# Allegro board LAUNCHPAD_checkpoint0.brd
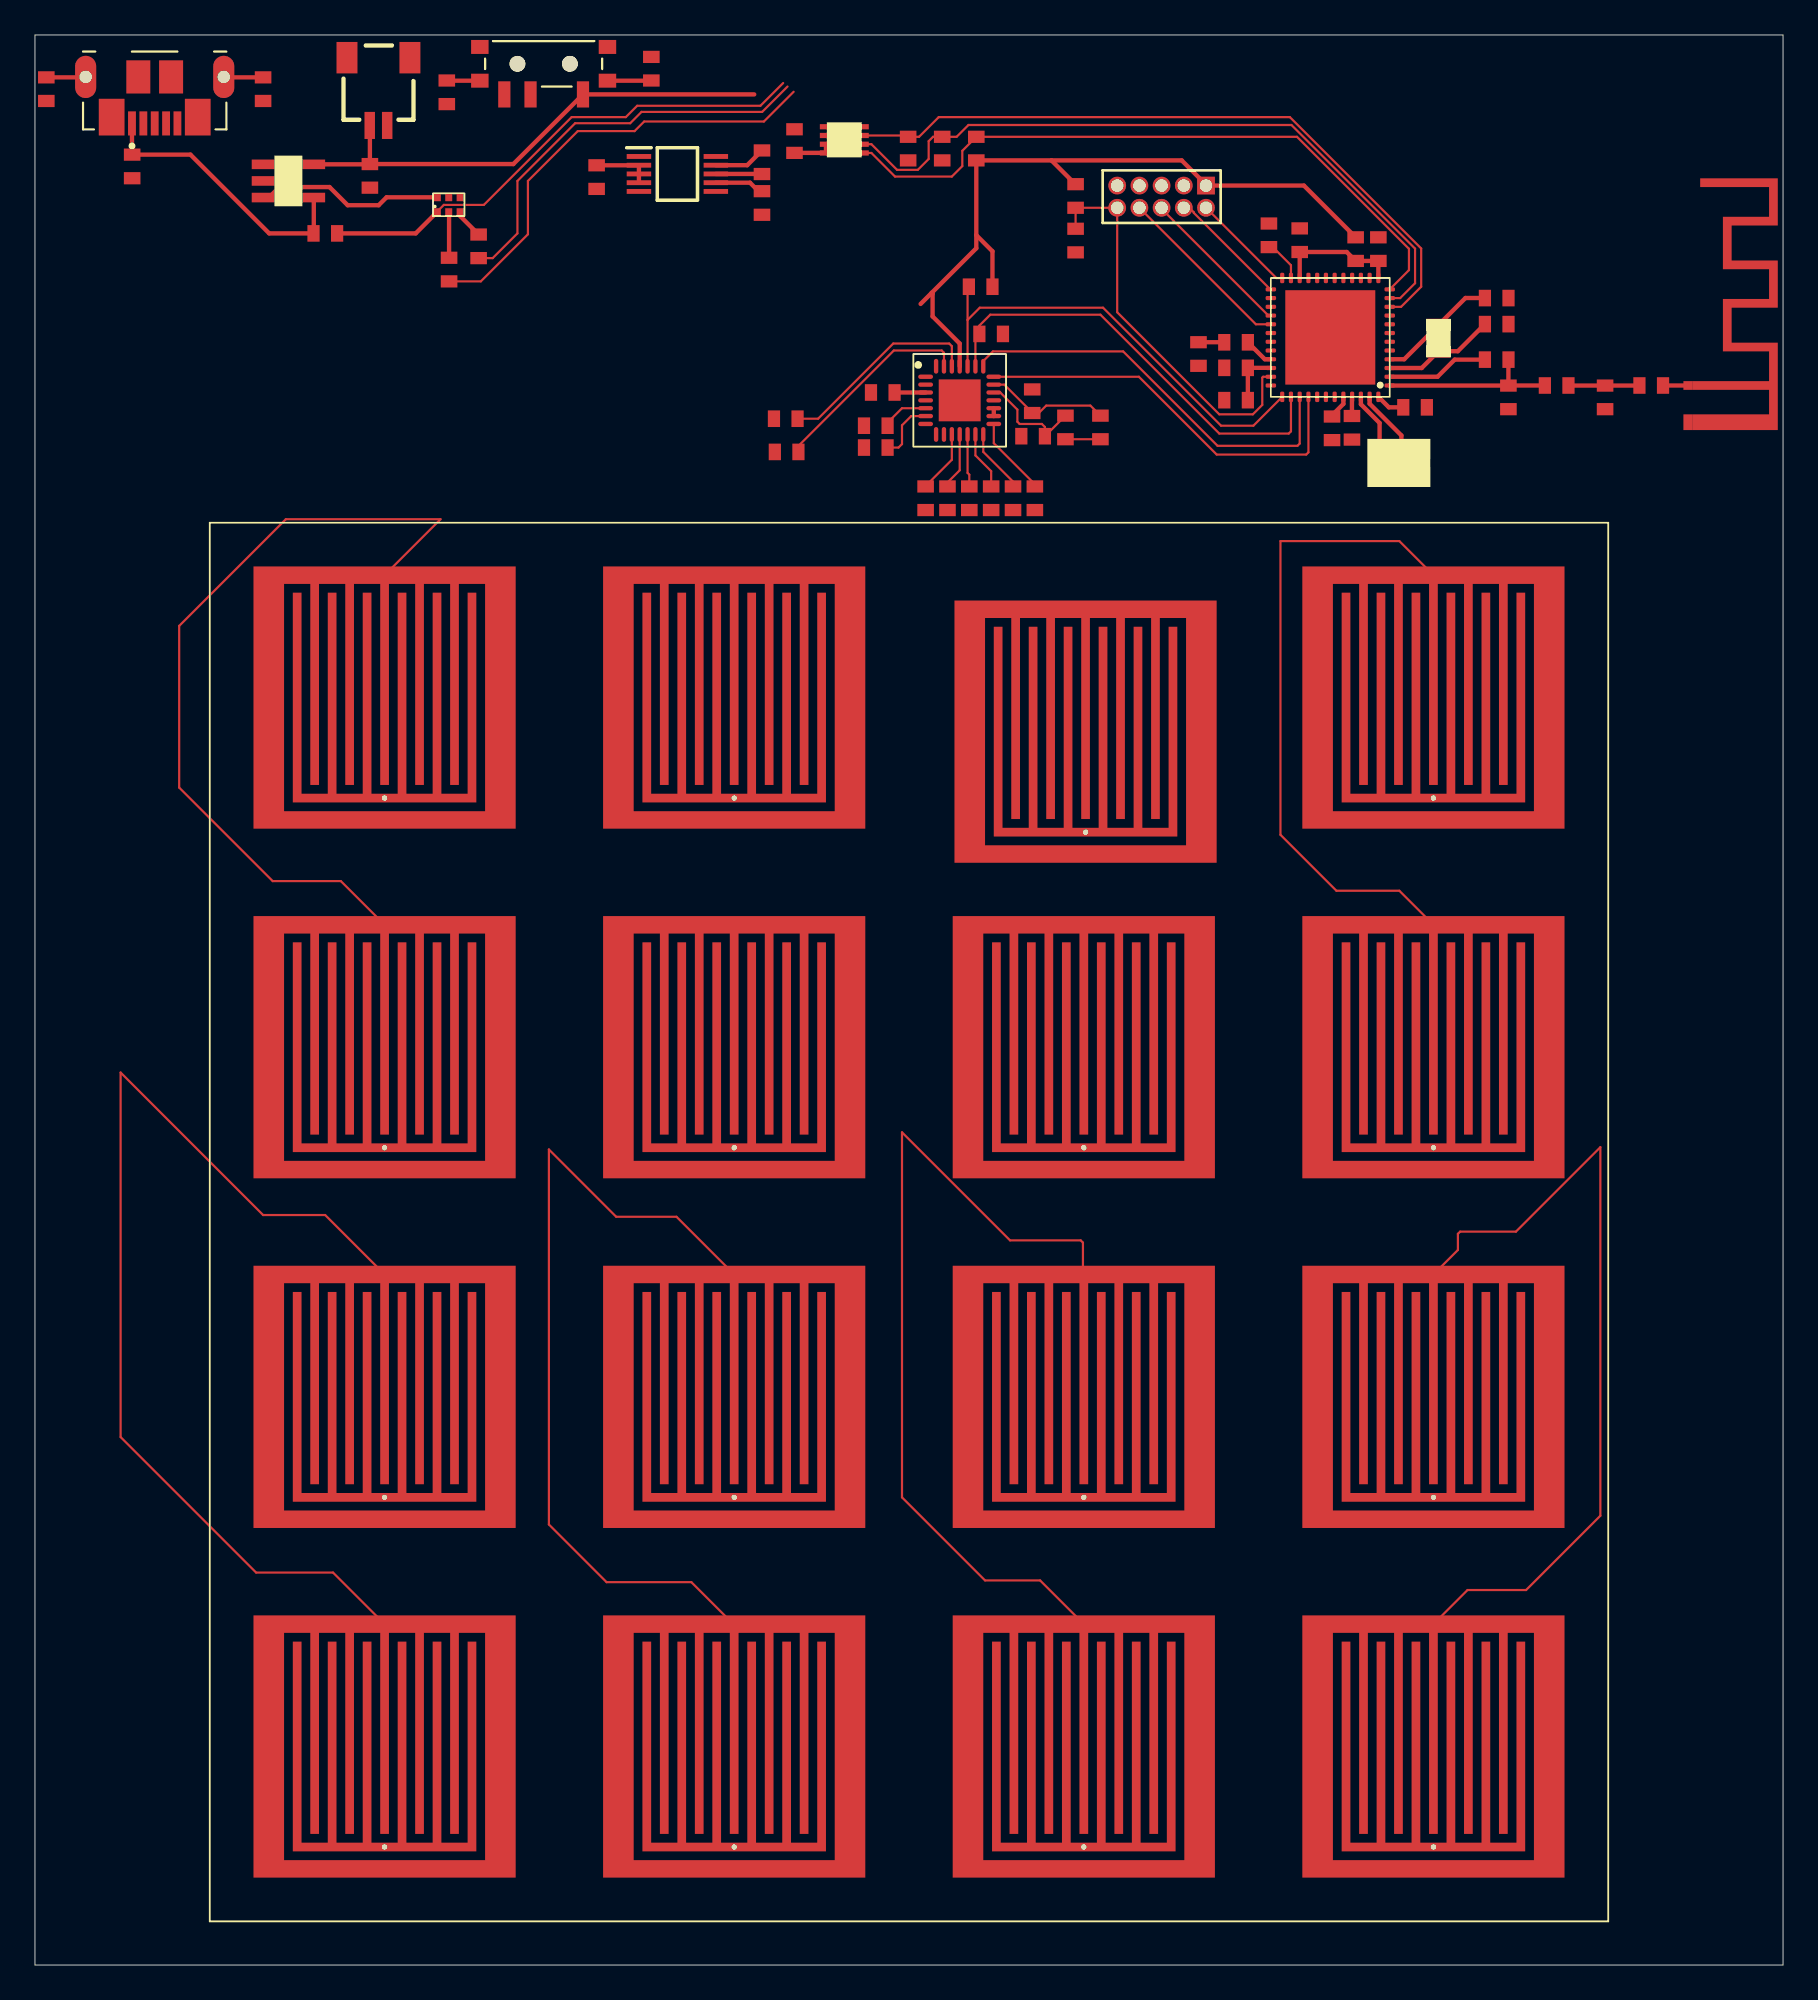
[diagram p0: board, top side]
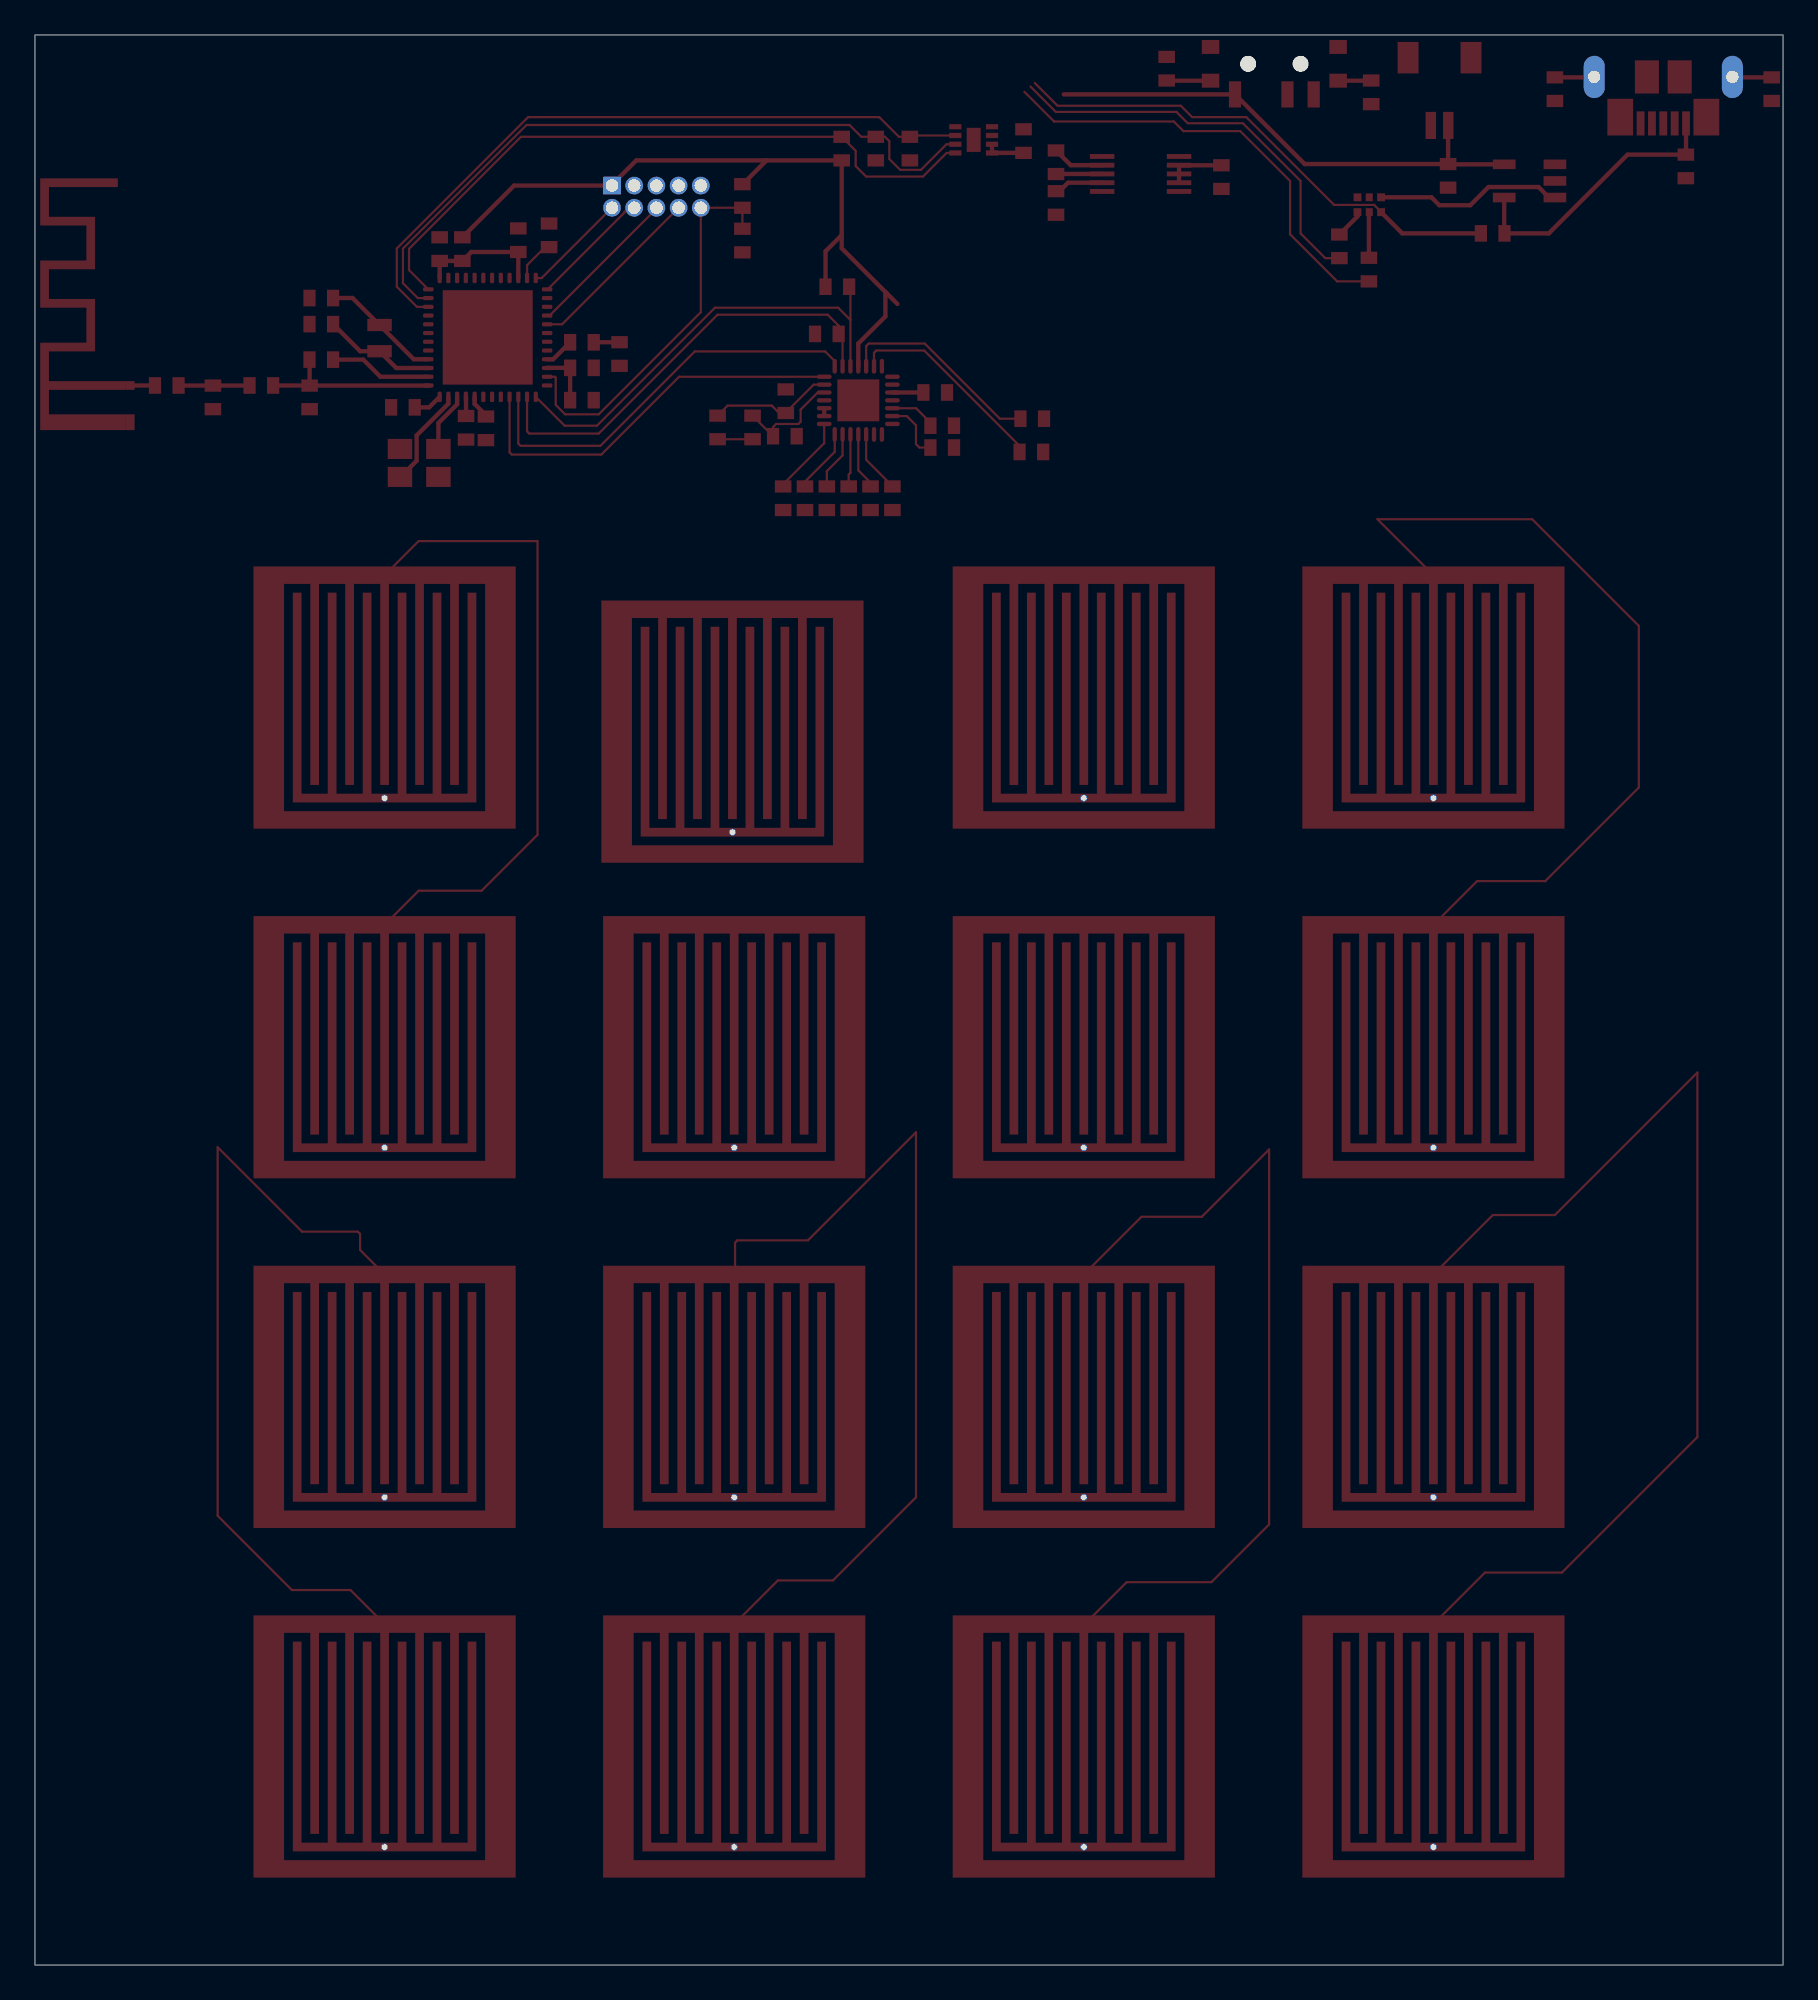
[diagram p1: board, bottom side, seen from below]

Outline 100 x 110.4 mm; copper layers: TOP, BOTTOM. Coordinates in mm from the lower left corner of the outline.
Outline path: 0,110.4 0,0 100,0 100,110.4 0,110.4

## Design rules (mm)
constraint set DEFAULT: min track width 0.127

## Placement (name value [footprint] x y rotation side)
A1  TI AN043  [AN043_PATCH_ANTENNA]  94.8 87.3 270 top
B1  QMatrix_Button  [QMATRIX_BUTTON_TOP]  20 32.5 0 top
B2  QMatrix_Button  [QMATRIX_BUTTON_TOP]  20 72.5 0 top
B3  QMatrix_Button  [QMATRIX_BUTTON_TOP]  40 32.5 0 top
B4  QMatrix_Button  [QMATRIX_BUTTON_TOP]  40 72.5 0 top
B5  QMatrix_Button  [QMATRIX_BUTTON_TOP]  60 32.5 0 top
B6  QMatrix_Button  [QMATRIX_BUTTON_TOP]  60.1 70.55 0 top
B7  QMatrix_Button  [QMATRIX_BUTTON_TOP]  80 72.5 0 top
B8  QMatrix_Button  [QMATRIX_BUTTON_TOP]  80 32.5 0 top
B9  QMatrix_Button  [QMATRIX_BUTTON_TOP]  20 12.5 0 top
B10  QMatrix_Button  [QMATRIX_BUTTON_TOP]  20 52.5 0 top
B11  QMatrix_Button  [QMATRIX_BUTTON_TOP]  40 12.5 0 top
B12  QMatrix_Button  [QMATRIX_BUTTON_TOP]  40 52.5 0 top
B13  QMatrix_Button  [QMATRIX_BUTTON_TOP]  60 12.5 0 top
B14  QMatrix_Button  [QMATRIX_BUTTON_TOP]  60 52.5 0 top
B15  QMatrix_Button  [QMATRIX_BUTTON_TOP]  80 52.5 0 top
B16  QMatrix_Button  [QMATRIX_BUTTON_TOP]  80 12.5 0 top
C1  12pF  [0603_C]  83.62 93.86 180 top
C2  12pF  [0603_C]  83.62 95.35 180 top
C3  1uF  [0603_C]  70.59 98.94 270 top
C4  100nF  [0603_C]  76.85 98.15 270 top
C5  100nF  [0603_C]  74.2 87.9 90 top
C6  10uF  [0603_C]  66.56 92.15 90 top
C7  100nF  [0603_C]  75.34 87.93 90 top
C8  100nF  [0603_C]  78.95 89.1 180 top
C9  100nF  [0603_C]  72.35 98.66 270 top
C10  100nF  [0603_C]  68.71 91.36 0 top
C11  10uF  [0603_C]  68.71 89.51 0 top
C12  12pF  [0603_C]  92.46 90.35 0 top
C13  1.2pF  [0603_C]  84.29 89.67 90 top
C14  1.2pF  [0603_C]  89.82 89.67 90 top
C15  100nF  [0603_C]  59.53 98.64 90 top
C16  330nF  [0603_C]  41.59 103.12 90 top
C17  100nF  [0603_C]  43.45 104.33 270 top
C18  10uF  [0603_C]  32.13 102.27 90 top
C19  10uF  [0603_C]  41.59 100.79 90 top
C20  1u  [0603_C]  19.16 102.34 90 top
C21  1u  [0603_C]  5.56 102.88 90 top
C22  100nF  [0603_C]  48.5 89.95 180 top
C23  4.7 nF  [0603_C]  57.1 87.45 180 top
C24  4.7 nF  [0603_C]  57.05 89.45 90 top
IC1  SC20S-7PF20PPM  [SMD_SC20S-7PF20PPM]  80.29 93.06 90 top
J1  FTSH-105-01-L-D-RA-K  [SAMTEC_FTSH-105-01-L-D-K]  64.45 101.15 180 top
J2  1051640001  [MOLEX_105164-0001]  6.85 109.45 180 top
J3  -  [SM02B-SRSS-TBLFSN]  19.65 107.2 180 top
L1  BLM18EG121SH1D  [0603_L]  75.55 98.15 270 top
L2  10uH  [0603_L]  68.71 92.82 180 top
L3  15nH  [0603_L]  83.62 91.83 0 top
L4  2nH  [0603_L]  87.05 90.35 0 top
LED1  SMLP36  [SMD_SMLP36]  23.67 100.69 0 top
R1  100kOhm  [0603_R]  59.53 101.19 90 top
R2  3.3kOhm  [0603_R]  53.85 103.9 270 top
R3  3.3kOhm  [0603_R]  51.9 103.9 270 top
R4  3.3kOhm  [0603_R]  49.95 103.9 270 top
R5  240 Ohm  [0603_R]  16.61 99.05 180 top
R6  33kOhm  [0603_R]  23.56 107.12 90 top
R7  33kOhm  [0603_R]  35.26 108.47 270 top
R8  33k  [0603_R]  13.05 107.3 270 top
R9  270 Ohm  [0603_R]  23.69 96.98 90 top
R10  82 Ohm  [0603_R]  25.38 98.31 90 top
R11  33k  [0603_R]  0.65 107.3 270 top
R13  3.3kOhm  [0603_R]  54.1 96 0 top
R14  3.3kOhm  [0603_R]  54.7 93.3 0 top
R15  1kOhm  [0603_R]  48.1 86.8 180 top
R16  1kOhm  [0603_R]  48.1 88.05 180 top
R17  1kOhm  [0603_R]  57.2 83.9 270 top
R18  1kOhm  [0603_R]  55.95 83.9 270 top
R19  1kOhm  [0603_R]  54.7 83.9 270 top
R20  1kOhm  [0603_R]  53.45 83.9 270 top
R21  1kOhm  [0603_R]  52.2 83.9 270 top
R22  1kOhm  [0603_R]  50.95 83.9 270 top
R23  1kOhm  [0603_R]  42.95 88.45 180 top
R24  1kOhm  [0603_R]  43 86.55 180 top
R25  1MOhm  [0603_R]  60.95 87.95 90 top
R26  1MOhm  [0603_R]  58.95 87.95 90 top
SW1  PCM12SMTR  [SW_PCM12SMTR]  29.1 108.75 180 top
U1  TI-CC2640  [SMD_CC2640R2F_RGZ_48]  74.1 93.1 180 top
U2  MAX1759  [SMD_MAX1759]  36.75 102.45 0 top
U3  MAX17048  [SMD_MAX17048]  46.3 104.4 270 top
U4  MAXIM MAX1555  [SMD_MAX1555]  14.5 102.05 270 top
U5  AT42QT2160  [QFN45P400X400X90-29N-D]  52.9 89.5 0 top
Y1  TSX-3225240000MF15X-AC3  [SMD_TSX-3225240000MF15X-AC3]  78.02 85.92 0 top

## Library data of the parts
A1 = Antenna
B1-B16 = QMatrix_Button
C1-C24 = C
IC1 = SC20S-7PF20PPM
J1 = FTSH-105-01-L-D-RA-K
J2 = 1051640001
J3 = SM02B-SRSS-TBLFSN
L1 = FerriteBead
L2-L4 = L
LED1 = SMLP36
R1-R11 R13-R26 = R
SW1 = PCM12SMTR
U1 = TI-CC2640
U2 = MAX1759
U3 = MAX17048
U4 = MAX1555
U5 = AT42QT2160
Y1 = TSX-3225240000MF15X-AC3

## Footprints (pads in the part's own frame, mm; a bottom-side part is the same pattern mirrored in y, then rotated)
0603_C
  rect 0.7x0.95 smd: 1(-0.675,0) 2(0.675,0)
0603_L
  rect 0.7x0.95 smd: 1(-0.675,0) 2(0.675,0)
0603_R
  rect 0.7x0.95 smd: 1(-0.675,0) 2(0.675,0)
AN043_PATCH_ANTENNA
  rect 0.9x0.5 smd: 1(-0.95,-0.25)
  rect 0.5x0.5 smd: 2(-3.05,-0.25)
MOLEX_105164-0001
  rect 0.45x1.38 smd: 1(1.3,4.11) 2(0.65,4.11) 3(0,4.11) 4(-0.65,4.11) 5(-1.3,4.11)
  oval 1.208x2.416 hole 0.7: 6(-3.95,1.45) 11(3.95,1.45)
  rect 1.475x2.1 smd: 7(-2.462,3.75) 10(2.462,3.75)
  rect 1.375x1.9 smd: 8(-0.938,1.45) 9(0.938,1.45)
QFN45P400X400X90-29N-D
  rrect 0.85x0.25 smd: 1(-1.95,1.35) 2(-1.95,0.9) 3(-1.95,0.45) 4(-1.95,0) 5(-1.95,-0.45) 6(-1.95,-0.9) 7(-1.95,-1.35) 15(1.95,-1.35) 16(1.95,-0.9) 17(1.95,-0.45) 18(1.95,0) 19(1.95,0.45) 20(1.95,0.9) 21(1.95,1.35)
  rrect 0.25x0.85 smd: 8(-1.35,-1.95) 9(-0.9,-1.95) 10(-0.45,-1.95) 11(0,-1.95) 12(0.45,-1.95) 13(0.9,-1.95) 14(1.35,-1.95) 22(1.35,1.95) 23(0.9,1.95) 24(0.45,1.95) 25(0,1.95) 26(-0.45,1.95) 27(-0.9,1.95) 28(-1.35,1.95)
  rect 2.4x2.4 smd: 29(0,0)
QMATRIX_BUTTON_TOP
  round 0.5 smd: 1(0,7)
  round 0.4 hole 0.3: 2(0,-5.75)
SAMTEC_FTSH-105-01-L-D-K
  rect 1.016x1.016 hole 0.711: 1(-2.54,-0.635)
  round 1.016 hole 0.711: 2(-2.54,0.635) 3(-1.27,-0.635) 4(-1.27,0.635) 5(0,-0.635) 6(0,0.635) 7(1.27,-0.635) 8(1.27,0.635) 9(2.54,-0.635) 10(2.54,0.635)
SM02B-SRSS-TBLFSN
  rect 0.6x1.55 smd: 1(-0.5,1.975) 2(0.5,1.975)
  rect 1.2x1.8 smd: 3(-1.8,-1.9) 4(1.8,-1.9)
SMD_CC2640R2F_RGZ_48
  rrect 0.6x0.24 smd: 1(-3.4,2.75) 2(-3.4,2.25) 3(-3.4,1.75) 4(-3.4,1.25) 5(-3.4,0.75) 6(-3.4,0.25) 7(-3.4,-0.25) 8(-3.4,-0.75) 9(-3.4,-1.25) 10(-3.4,-1.75) 11(-3.4,-2.25) 12(-3.4,-2.75) 25(3.4,-2.75) 26(3.4,-2.25) 27(3.4,-1.75) 28(3.4,-1.25) 29(3.4,-0.75) 30(3.4,-0.25) 31(3.4,0.25) 32(3.4,0.75) 33(3.4,1.25) 34(3.4,1.75) 35(3.4,2.25) 36(3.4,2.75)
  rrect 0.24x0.6 smd: 13(-2.75,-3.4) 14(-2.25,-3.4) 15(-1.75,-3.4) 16(-1.25,-3.4) 17(-0.75,-3.4) 18(-0.25,-3.4) 19(0.25,-3.4) 20(0.75,-3.4) 21(1.25,-3.4) 22(1.75,-3.4) 23(2.25,-3.4) 24(2.75,-3.4)
  rrect 0.6x0.24 smd rot 90.2: 37(2.75,3.4) 38(2.25,3.4) 39(1.75,3.4) 40(1.25,3.4) 41(0.75,3.4) 42(0.25,3.4) 43(-0.25,3.4) 44(-0.75,3.4) 45(-1.25,3.4) 46(-1.75,3.4) 47(-2.25,3.4) 48(-2.75,3.4)
  rect 5.15x5.4 smd: 49(0,0)
SMD_MAX1555
  rect 0.55x1.3 smd: 1(-0.95,-1.45) 2(0,-1.45) 3(0.95,-1.45) 4(0.95,1.45) 5(-0.95,1.45)
SMD_MAX1759
  rect 1.4x0.28 smd: 1(-2.2,1) 2(-2.2,0.5) 3(-2.2,0) 4(-2.2,-0.5) 5(-2.2,-1) 6(2.2,-1) 7(2.2,-0.5) 8(2.2,0) 9(2.2,0.5) 10(2.2,1)
SMD_MAX17048
  rect 0.3x0.7 smd: 1(0.75,-1.05) 2(0.25,-1.05) 3(-0.25,-1.05) 4(-0.75,-1.05) 5(-0.75,1.05) 6(-0.25,1.05) 7(0.25,1.05) 8(0.75,1.05)
  rect 1.38x0.8 smd: 9(0,0)
SMD_SC20S-7PF20PPM
  rect 0.7x1.4 smd: 1(-0.75,0) 2(0.75,0)
SMD_SMLP36
  rect 0.45x0.45 smd: 1(-0.675,-0.425) 3(0.675,-0.425) 4(0.675,0.425) 6(-0.675,0.425)
  rect 0.4x0.45 smd: 2(0,-0.425) 5(0,0.425)
SMD_TSX-3225240000MF15X-AC3
  rect 1.4x1.15 smd: 1(-1.1,0.8) 2(1.1,0.8) 3(1.1,-0.8) 4(-1.1,-0.8)
SW_PCM12SMTR
  round 0.9 hole 0.9 unplated: (-1.5,0) (1.5,0)
  rect 0.7x1.5 smd: 1(-2.25,1.75) 2(0.75,1.75) 3(2.25,1.75)
  rect 1x0.8 smd: S1(-3.65,0.965) S2(-3.65,-0.965) S3(3.65,-0.965) S4(3.65,0.965)

## Nets
GND_SIGNAL: A1.1(-) C1.1 C2.1 C3.1 C4.1 C5.1 C6.1 C7.1 C8.1 C9.1 C10.1 C11.1 C13.1 C14.1 C15.1 C17.1 C18.1 C19.1 C20.1 C21.1 C22.2 J1.3 J1.5 J1.9 J2.5 J3.1 LED1.4 LED1.5(CR) R6.1 R7.1 R8.2 R11.2 U1.49 U2.5 U2.6 U2.10 U3.3 U3.4 U3.9 U4.2 U5.4 U5.8 U5.18 U5.29 Y1.2 Y1.4
VDD: C19.2 C22.1 J1.1 L1.1 R1.2 R2.2 R3.2 R4.2 R13.2 R14.2 U2.7 U5.3 U5.16 U5.17 U5.25
VDDR: C6.2 C7.2 C8.2 L2.2 U1.45 U1.48
VDDS: C4.2 C5.2 C9.2 C10.2 C11.2 L1.2(B) U1.13 U1.22 U1.34 U1.44
ALRTN_17048: R2.1 U1.12 U3.8
BAT+: C17.2 C20.2 J3.2 SW1.1 U3.1(VDD) U3.2 U4.5
DCDC_SW: L2.1 U1.33
DCOUPL: C3.2 U1.23
I2CA0_QT2160: U1.40 U5.21
I2CA1_QT2160: U1.39 U5.22
LED_BLUE: LED1.1 R5.1 U1.7
LED_GREEN: R10.1 U1.9
LED_RED: R9.1 U1.8
RF_ANTENNA: A1.2 C12.2
RF_N: L3.1 U1.2
RF_P: C13.2 L3.2 L4.1 U1.1
RST: C15.2 J1.10 R1.1 U1.35
SCL_17048: R4.1 U1.10 U3.6
SCL_QT2160: R13.1 U1.37 U5.24
SDA_17048: R3.1 U1.11 U3.7
SDA_QT2160: R14.1 U1.38 U5.23
SW_OUT: C18.2 SW1.2 U2.2(SHDN_N) U2.3 U2.4
TCKC: J1.4 U1.25
TDI: J1.8 U1.29
TDO: J1.6 U1.28
TMSC: J1.2 U1.24
X0: B1.1 B9.1 R22.2
X1: B2.1 B10.1 R21.2
X2: B3.1 B11.1 R20.2
X3: B4.1 B12.1 R19.2
X4: B5.1 B13.1 R18.2
X5: B6.1 B14.1 R17.2
X6: B7.1 B15.1 R16.2
X7: B8.1 B16.1 R15.2
Y0: B1.2(Y) B2.2(Y) B3.2(Y) B4.2(Y) B5.2(Y) B6.2(Y) B7.2(Y) B8.2(Y) R23.2
Y1: B9.2(Y) B10.2(Y) B11.2(Y) B12.2(Y) B13.2(Y) B14.2(Y) B15.2(Y) B16.2(Y) R24.2
N01048: C16.1 U2.8
N01939: C21.2 J2.1(VBUS) R5.2 U4.4
N007970: C16.2 U2.9
N09779: R15.1 U5.6
N09783: R16.1 U5.5
N09795: R17.1 U5.15
N09799: R18.1 U5.14
N09803: R19.1 U5.13
N09807: R20.1 U5.12
N09811: R21.1 U5.11
N09815: R22.1 U5.10
N11484: C23.2 R23.1 U5.26
N11551: C23.1 R26.2 U5.19
N11691: C24.2 R24.1 U5.27
N11716: C24.1 R25.2 U5.20(Y1B)
N11800: R25.1 R26.1 U5.9
N16165: U1.47 Y1.3
N16180: U1.46 Y1.1
N16326: C1.2 IC1.1 U1.3
N16335: C2.2 IC1.2 U1.4(X32K_Q2)
N20124: LED1.6 U4.3
N20418: LED1.3 R10.2
N20445: LED1.2 R9.2
N41051: R7.2 SW1.S1
N47314: C12.1 C14.2 L4.2
N72888: J2.6 R8.1
N72942: J2.11 R11.1
N408580: R6.2 SW1.S4(SHIELD_4)

Pads without a net: J1 7; J2 2 3 4 7 8 9 10; J3 3 4; SW1 3 S2 S3; U1 5 6 14 15 16 17 18 19 20 21 26 27 30 31 32 36 41 42 43; U2 1; U3 5; U4 1; U5 1 2 7 28

## Routing (per net, layer and track width the routed paths; a pad name or vN(x,y) marks a point on that pad's centre or on a via; arc(x,y) is an arc through that point)
VDD: length 48.3
  TOP w0.25: U5.25 52.9,92.75 51.35,94.3 51.35,95.6 51.3,95.65 ; 53.85,98.95 R2.2 58.15,103.22 ; 53.85,98.95 53.85,98.2 51.3,95.65 ; 53.85,98.95 54.77,98.03 54.77,96 ; L1.1 72.59,101.78 J1.1 66.99,101.84 65.6,103.22 58.15,103.22 ; 51.3,95.65 50.66,95.02 ; 58.15,103.22 59.51,101.87 R1.2 ; C22.1 U5.3 ; C19.2 41.39,101.47 40.9,101.95 U2.7 ; U5.17 U5.16
VDDR: length 4.2
  TOP w0.25: U1.48 77.45,89.1 C8.2 ; C7.2 75.34,89.69 U1.45 ; C6.2 68.03,92.83 L2.2
VDDS: length 11.7
  TOP w0.25: C5.2 74.2,88.65 74.85,89.3 U1.44 ; U1.22 C9.2 75.04,97.98 L1.2 C4.2 U1.13 ; C11.2 C10.2 70.69,91.36 U1.34
ALRTN_17048: length 38.7
  TOP w0.127: U1.12 78.6,96.95 78.6,98.17 72.19,104.58 53.85,104.58 53.05,103.78 53.05,102.9 52.45,102.3 49.2,102.3 47.85,103.65 U3.8
BAT+: length 31.4
  TOP w0.25: U4.5 19.14,103 C20.2 ; 41.14,107 SW1.1 27.36,103.02 C20.2 ; C17.2 45.24,103.66 U3.1 U3.2 ; C20.2 19.16,105.22 J3.2
DCDC_SW: length 1.7
  TOP w0.25: U1.33 70.36,91.85 L2.1
DCOUPL: length 2.4
  TOP w0.127: U1.23 71.85,97.23 70.81,98.27 C3.2
I2CA0_QT2160: length 23.1
  TOP w0.127: U5.21 63.15,90.85 67.6,86.4 72.72,86.4 72.85,86.53 U1.40
I2CA1_QT2160: length 23.6
  TOP w0.127: U1.39 72.35,87.03 72.22,86.9 67.65,86.9 62.25,92.3 54.8,92.3 54.25,91.75 U5.22
LED_BLUE: length 29.1
  TOP w0.127: LED1.1 23,100.28 23.39,100.68 25.68,100.68 30.7,105.7 33.8,105.7 34.45,106.35 41.5,106.35 42.8,107.65
  TOP w0.25: R5.1 21.78,99.05 LED1.1
LED_GREEN: length 23.5
  TOP w0.127: R10.1 26.18,97.63 27.6,99.05 27.6,102.05 30.9,105.35 34.05,105.35 34.7,106 41.6,106 43.05,107.45
LED_RED: length 26
  TOP w0.127: 43.4,107.15 41.7,105.45 34.85,105.45 34.3,104.9 31.05,104.9 28.2,102.05 28.2,99 25.5,96.31 R9.1
RF_ANTENNA: length 1.4
  TOP w0.25: C12.2 A1.2
RF_N: length 5.9
  TOP w0.25: U1.2 80.24,90.85 81.22,91.83 L3.1
RF_P: length 10.4
  TOP w0.25: 84.29,90.34 77.5,90.34 U1.1 ; 84.29,90.34 84.3,90.35 L4.1 ; 84.29,90.34 84.29,91.83 84.3,91.83
RST: length 22.6
  TOP w0.127: C15.2 R1.1 J1.10 61.91,94.54 67.75,88.7 69.67,88.7 70.21,89.24 70.21,90.8 70.26,90.85 U1.35 70.69,90.84
SCL_17048: length 40
  TOP w0.127: U1.10 78.15,94.85 79.3,96 79.3,98.19 71.79,105.7 51.7,105.7 50.58,104.58 49.95,104.58 49.88,104.65 U3.6
SCL_QT2160: length 26.4
  TOP w0.127: U1.37 69.7,88.05 67.85,88.05 61.1,94.8 54.05,94.8 53.35,94.1 ; R13.1 53.35,95.92 53.35,94.1 ; 53.35,94.1 U5.24
SDA_17048: length 40.6
  TOP w0.127: U1.11 78.1,95.35 78.95,96.2 78.95,98.18 71.88,105.25 53.4,105.25 52.73,104.58 51.38,104.58 51.12,104.33 51.12,103.31 50.5,102.68 49.32,102.68 47.85,104.15 U3.7
SDA_QT2160: length 25.3
  TOP w0.127: U5.23 53.8,93.08 R14.1 54.02,93.78 54.65,94.4 60.95,94.4 67.75,87.6 71.72,87.6 71.85,87.73 U1.38
SW_OUT: length 3.4
  TOP w0.25: C18.2 34.55,102.94 U2.2 U2.3 U2.4
TCKC: length 6.9
  TOP w0.127: J1.4 66.03,100.52 66.29,100.26 66.29,100.23 70.67,95.85 U1.25
TDI: length 10.3
  TOP w0.127: U1.29 69.84,93.85 J1.8
TDO: length 8.8
  TOP w0.127: U1.28 70.56,94.35 64.45,100.46 J1.6
TMSC: length 6
  TOP w0.127: U1.24 71.34,96.5 71.02,96.5 67,100.52 J1.2
X0: length 60.3
  TOP w0.127: B1.1 16.6,42.9 13.05,42.9 4.9,51.05 4.9,30.2 12.65,22.45 17.05,22.45 B9.1
X1: length 46.3
  TOP w0.127: B10.1 17.5,62 13.6,62 8.25,67.35 8.25,76.6 14.35,82.7 23.2,82.7 B2.1
X2: length 48.8
  TOP w0.127: 40.29,19.16 40.18,19.06 39.82,19.06 39.56,19.32 39.56,19.89 37.55,21.9 32.7,21.9 29.4,25.2 29.4,46.65 33.25,42.8 36.7,42.8 B3.1
X4: length 49.1
  TOP w0.127: B13.1 57.5,22 54.35,22 49.6,26.75 49.6,47.63 55.78,41.45 59.82,41.45 59.95,41.32 59.95,39.55 B5.1
X6: length 37.2
  TOP w0.127: B7.1 78.05,81.45 71.25,81.45 71.25,64.65 74.45,61.45 78.05,61.45 B15.1
X7: length 46.3
  TOP w0.127: B16.1 81.95,21.45 85.3,21.45 89.55,25.7 89.55,46.78 84.72,41.95 81.53,41.95 81.4,41.82 81.4,40.9 B8.1
N01048: length 2.6
  TOP w0.25: C16.1 41.59,102.45 U2.8
N01939: length 16.1
  TOP w0.25: J2.1 5.55,103.56 C21.2 8.9,103.56 13.4,99.05 R5.2 15.95,99.06 U4.4
N007970: length 3
  TOP w0.25: 41.59,103.8 40.74,102.95 U2.9
N09779: length 3.5
  TOP w0.127: U5.6 50.13,88.6 49.6,88.07 49.6,87 49.4,86.8 R15.1
N09783: length 2.7
  TOP w0.127: U5.5 49.6,89.05 48.77,88.22 R16.1
N09795: length 4.5
  TOP w0.127: R17.1 57.2,84.7 54.85,87.05 U5.15
N09799: length 3.7
  TOP w0.127: R18.1 55.95,84.85 54.25,86.55 U5.14
N09803: length 3.3
  TOP w0.127: U5.13 53.8,86.35 54.7,85.45 R19.1
N09807: length 3
  TOP w0.127: U5.12 53.35,85.35 53.45,85.25 R20.1
N09811: length 3.3
  TOP w0.127: U5.11 52.9,85.5 52.2,84.8 R21.1
N09815: length 3.6
  TOP w0.127: R22.1 50.95,84.6 52.45,86.1 U5.10
N11484: length 11.8
  TOP w0.127: R23.1 44.8,88.45 49.1,92.75 52.3,92.75 52.45,92.6 U5.26
N11551: length 6.3
  TOP w0.127: U5.19 55.22,89.95 56.2,88.97 56.2,88.28 56.33,88.15 57.6,88.15 57.77,87.97 57.77,87.45 R26.2
N11691: length 11.8
  TOP w0.127: U5.27 52,92.22 51.87,92.35 49.13,92.35 43.67,86.89 R24.1
N11716: length 7.2
  TOP w0.127: U5.20 55.45,90.4 57.05,88.8 C24.1 57.42,88.78 57.85,89.2 60.38,89.2 R25.2
N11800: length 2
  TOP w0.127: R25.1 R26.1
N16165: length 5.7
  TOP w0.25: U1.47 76.35,89.31 78.17,87.49 78.17,86.04 79.09,85.12 Y1.3
N16180: length 3.4
  TOP w0.25: Y1.1 76.92,88.21 75.85,89.28 U1.46
N16326: length 6.5
  TOP w0.25: C1.2 81.39,92.31 IC1.1 79.33,91.35 U1.3
N16335: length 6.9
  TOP w0.25: U1.4 78.33,91.85 IC1.2 81.84,95.35 82.94,95.35 C2.2
N20124: length 10.8
  TOP w0.25: U4.3 13.38,101.1 13.98,101.7 16.85,101.7 17.89,100.66 19.66,100.66 20.11,101.12 23,101.12
N20418: length 1.7
  TOP w0.25: R10.2 24.34,100.02 24.34,100.27
N20445: length 2.6
  TOP w0.25: 23.69,97.66 23.69,100.25 LED1.2
N41051: length 2.5
  TOP w0.25: SW1.S1 35.25,107.78 R7.2
N47314: length 4.1
  TOP w0.25: 91.78,90.35 91.78,90.34 87.73,90.34 L4.2
N72888: length 2.3
  TOP w0.25: J2.6 10.83,107.97 13.05,107.97
N72942: length 2.3
  TOP w0.25: 0.65,107.97 2.88,107.97 J2.11
N408580: length 1.9
  TOP w0.25: 23.56,107.8 23.57,107.78 SW1.S4

## Copper pours and planes (outline as drawn; the poured copper is in the pictures)
RF_ANTENNA on TOP (solid shape): 99.7,99.5 97.06,99.5 97.06,97.5 99.7,97.5 99.7,94.8 97.06,94.8 97.06,92.8 99.7,92.8 99.7,87.8 94.8,87.8 94.8,88.7 99.2,88.7 99.2,90.1 94.8,90.1 94.8,90.6 99.2,90.6 99.2,92.3 96.56,92.3 96.56,95.3 99.2,95.3 99.2,97 96.56,97 96.56,100 99.2,100 99.2,101.7 95.26,101.7 95.26,102.2 99.7,102.2
X0 on TOP (solid shape): 27.5,25 12.5,25 12.5,26 25.75,26 25.75,39 24.25,39 24.25,27.5 23.75,27.5 23.75,39 22.25,39 22.25,27.5 21.75,27.5 21.75,39 20.25,39 20.25,27.5 19.75,27.5 19.75,39 18.25,39 18.25,27.5 17.75,27.5 17.75,39 16.25,39 16.25,27.5 15.75,27.5 15.75,39 14.25,39 14.25,26 12.5,26 12.5,40 27.5,40
X0 on TOP (solid shape): 27.5,5 12.5,5 12.5,6 25.75,6 25.75,19 24.25,19 24.25,7.5 23.75,7.5 23.75,19 22.25,19 22.25,7.5 21.75,7.5 21.75,19 20.25,19 20.25,7.5 19.75,7.5 19.75,19 18.25,19 18.25,7.5 17.75,7.5 17.75,19 16.25,19 16.25,7.5 15.75,7.5 15.75,19 14.25,19 14.25,6 12.5,6 12.5,20 27.5,20
X1 on TOP (solid shape): 27.5,65 12.5,65 12.5,66 25.75,66 25.75,79 24.25,79 24.25,67.5 23.75,67.5 23.75,79 22.25,79 22.25,67.5 21.75,67.5 21.75,79 20.25,79 20.25,67.5 19.75,67.5 19.75,79 18.25,79 18.25,67.5 17.75,67.5 17.75,79 16.25,79 16.25,67.5 15.75,67.5 15.75,79 14.25,79 14.25,66 12.5,66 12.5,80 27.5,80
X1 on TOP (solid shape): 27.5,45 12.5,45 12.5,46 25.75,46 25.75,59 24.25,59 24.25,47.5 23.75,47.5 23.75,59 22.25,59 22.25,47.5 21.75,47.5 21.75,59 20.25,59 20.25,47.5 19.75,47.5 19.75,59 18.25,59 18.25,47.5 17.75,47.5 17.75,59 16.25,59 16.25,47.5 15.75,47.5 15.75,59 14.25,59 14.25,46 12.5,46 12.5,60 27.5,60
X2 on TOP (solid shape): 47.5,25 32.5,25 32.5,26 45.75,26 45.75,39 44.25,39 44.25,27.5 43.75,27.5 43.75,39 42.25,39 42.25,27.5 41.75,27.5 41.75,39 40.25,39 40.25,27.5 39.75,27.5 39.75,39 38.25,39 38.25,27.5 37.75,27.5 37.75,39 36.25,39 36.25,27.5 35.75,27.5 35.75,39 34.25,39 34.25,26 32.5,26 32.5,40 47.5,40
X2 on TOP (solid shape): 47.5,5 32.5,5 32.5,6 45.75,6 45.75,19 44.25,19 44.25,7.5 43.75,7.5 43.75,19 42.25,19 42.25,7.5 41.75,7.5 41.75,19 40.25,19 40.25,7.5 39.75,7.5 39.75,19 38.25,19 38.25,7.5 37.75,7.5 37.75,19 36.25,19 36.25,7.5 35.75,7.5 35.75,19 34.25,19 34.25,6 32.5,6 32.5,20 47.5,20
X3 on TOP (solid shape): 47.5,65 32.5,65 32.5,66 45.75,66 45.75,79 44.25,79 44.25,67.5 43.75,67.5 43.75,79 42.25,79 42.25,67.5 41.75,67.5 41.75,79 40.25,79 40.25,67.5 39.75,67.5 39.75,79 38.25,79 38.25,67.5 37.75,67.5 37.75,79 36.25,79 36.25,67.5 35.75,67.5 35.75,79 34.25,79 34.25,66 32.5,66 32.5,80 47.5,80
X3 on TOP (solid shape): 47.5,45 32.5,45 32.5,46 45.75,46 45.75,59 44.25,59 44.25,47.5 43.75,47.5 43.75,59 42.25,59 42.25,47.5 41.75,47.5 41.75,59 40.25,59 40.25,47.5 39.75,47.5 39.75,59 38.25,59 38.25,47.5 37.75,47.5 37.75,59 36.25,59 36.25,47.5 35.75,47.5 35.75,59 34.25,59 34.25,46 32.5,46 32.5,60 47.5,60
X4 on TOP (solid shape): 67.5,25 52.5,25 52.5,26 65.75,26 65.75,39 64.25,39 64.25,27.5 63.75,27.5 63.75,39 62.25,39 62.25,27.5 61.75,27.5 61.75,39 60.25,39 60.25,27.5 59.75,27.5 59.75,39 58.25,39 58.25,27.5 57.75,27.5 57.75,39 56.25,39 56.25,27.5 55.75,27.5 55.75,39 54.25,39 54.25,26 52.5,26 52.5,40 67.5,40
X4 on TOP (solid shape): 67.5,5 52.5,5 52.5,6 65.75,6 65.75,19 64.25,19 64.25,7.5 63.75,7.5 63.75,19 62.25,19 62.25,7.5 61.75,7.5 61.75,19 60.25,19 60.25,7.5 59.75,7.5 59.75,19 58.25,19 58.25,7.5 57.75,7.5 57.75,19 56.25,19 56.25,7.5 55.75,7.5 55.75,19 54.25,19 54.25,6 52.5,6 52.5,20 67.5,20
X5 on TOP (solid shape): 67.5,45 52.5,45 52.5,46 65.75,46 65.75,59 64.25,59 64.25,47.5 63.75,47.5 63.75,59 62.25,59 62.25,47.5 61.75,47.5 61.75,59 60.25,59 60.25,47.5 59.75,47.5 59.75,59 58.25,59 58.25,47.5 57.75,47.5 57.75,59 56.25,59 56.25,47.5 55.75,47.5 55.75,59 54.25,59 54.25,46 52.5,46 52.5,60 67.5,60
X5 on TOP (solid shape): 67.6,63.05 52.6,63.05 52.6,64.05 65.85,64.05 65.85,77.05 64.35,77.05 64.35,65.55 63.85,65.55 63.85,77.05 62.35,77.05 62.35,65.55 61.85,65.55 61.85,77.05 60.35,77.05 60.35,65.55 59.85,65.55 59.85,77.05 58.35,77.05 58.35,65.55 57.85,65.55 57.85,77.05 56.35,77.05 56.35,65.55 55.85,65.55 55.85,77.05 54.35,77.05 54.35,64.05 52.6,64.05 52.6,78.05 67.6,78.05
X6 on TOP (solid shape): 87.5,65 72.5,65 72.5,66 85.75,66 85.75,79 84.25,79 84.25,67.5 83.75,67.5 83.75,79 82.25,79 82.25,67.5 81.75,67.5 81.75,79 80.25,79 80.25,67.5 79.75,67.5 79.75,79 78.25,79 78.25,67.5 77.75,67.5 77.75,79 76.25,79 76.25,67.5 75.75,67.5 75.75,79 74.25,79 74.25,66 72.5,66 72.5,80 87.5,80
X6 on TOP (solid shape): 87.5,45 72.5,45 72.5,46 85.75,46 85.75,59 84.25,59 84.25,47.5 83.75,47.5 83.75,59 82.25,59 82.25,47.5 81.75,47.5 81.75,59 80.25,59 80.25,47.5 79.75,47.5 79.75,59 78.25,59 78.25,47.5 77.75,47.5 77.75,59 76.25,59 76.25,47.5 75.75,47.5 75.75,59 74.25,59 74.25,46 72.5,46 72.5,60 87.5,60
X7 on TOP (solid shape): 87.5,25 72.5,25 72.5,26 85.75,26 85.75,39 84.25,39 84.25,27.5 83.75,27.5 83.75,39 82.25,39 82.25,27.5 81.75,27.5 81.75,39 80.25,39 80.25,27.5 79.75,27.5 79.75,39 78.25,39 78.25,27.5 77.75,27.5 77.75,39 76.25,39 76.25,27.5 75.75,27.5 75.75,39 74.25,39 74.25,26 72.5,26 72.5,40 87.5,40
X7 on TOP (solid shape): 87.5,5 72.5,5 72.5,6 85.75,6 85.75,19 84.25,19 84.25,7.5 83.75,7.5 83.75,19 82.25,19 82.25,7.5 81.75,7.5 81.75,19 80.25,19 80.25,7.5 79.75,7.5 79.75,19 78.25,19 78.25,7.5 77.75,7.5 77.75,19 76.25,19 76.25,7.5 75.75,7.5 75.75,19 74.25,19 74.25,6 72.5,6 72.5,20 87.5,20
Y0 on TOP (solid shape): 15.25,67 16.75,67 16.75,78.5 17.25,78.5 17.25,67 18.75,67 18.75,78.5 19.25,78.5 19.25,67 20.75,67 20.75,78.5 21.25,78.5 21.25,67 22.75,67 22.75,78.5 23.25,78.5 23.25,67 24.75,67 24.75,78.5 25.25,78.5 25.25,66.5 14.75,66.5 14.75,78.5 15.25,78.5
Y0 on TOP (solid shape): 15.25,27 16.75,27 16.75,38.5 17.25,38.5 17.25,27 18.75,27 18.75,38.5 19.25,38.5 19.25,27 20.75,27 20.75,38.5 21.25,38.5 21.25,27 22.75,27 22.75,38.5 23.25,38.5 23.25,27 24.75,27 24.75,38.5 25.25,38.5 25.25,26.5 14.75,26.5 14.75,38.5 15.25,38.5
Y0 on TOP (solid shape): 35.25,67 36.75,67 36.75,78.5 37.25,78.5 37.25,67 38.75,67 38.75,78.5 39.25,78.5 39.25,67 40.75,67 40.75,78.5 41.25,78.5 41.25,67 42.75,67 42.75,78.5 43.25,78.5 43.25,67 44.75,67 44.75,78.5 45.25,78.5 45.25,66.5 34.75,66.5 34.75,78.5 35.25,78.5
Y0 on TOP (solid shape): 35.25,27 36.75,27 36.75,38.5 37.25,38.5 37.25,27 38.75,27 38.75,38.5 39.25,38.5 39.25,27 40.75,27 40.75,38.5 41.25,38.5 41.25,27 42.75,27 42.75,38.5 43.25,38.5 43.25,27 44.75,27 44.75,38.5 45.25,38.5 45.25,26.5 34.75,26.5 34.75,38.5 35.25,38.5
Y0 on TOP (solid shape): 55.25,27 56.75,27 56.75,38.5 57.25,38.5 57.25,27 58.75,27 58.75,38.5 59.25,38.5 59.25,27 60.75,27 60.75,38.5 61.25,38.5 61.25,27 62.75,27 62.75,38.5 63.25,38.5 63.25,27 64.75,27 64.75,38.5 65.25,38.5 65.25,26.5 54.75,26.5 54.75,38.5 55.25,38.5
Y0 on TOP (solid shape): 55.35,65.05 56.85,65.05 56.85,76.55 57.35,76.55 57.35,65.05 58.85,65.05 58.85,76.55 59.35,76.55 59.35,65.05 60.85,65.05 60.85,76.55 61.35,76.55 61.35,65.05 62.85,65.05 62.85,76.55 63.35,76.55 63.35,65.05 64.85,65.05 64.85,76.55 65.35,76.55 65.35,64.55 54.85,64.55 54.85,76.55 55.35,76.55
Y0 on TOP (solid shape): 75.25,67 76.75,67 76.75,78.5 77.25,78.5 77.25,67 78.75,67 78.75,78.5 79.25,78.5 79.25,67 80.75,67 80.75,78.5 81.25,78.5 81.25,67 82.75,67 82.75,78.5 83.25,78.5 83.25,67 84.75,67 84.75,78.5 85.25,78.5 85.25,66.5 74.75,66.5 74.75,78.5 75.25,78.5
Y0 on TOP (solid shape): 75.25,27 76.75,27 76.75,38.5 77.25,38.5 77.25,27 78.75,27 78.75,38.5 79.25,38.5 79.25,27 80.75,27 80.75,38.5 81.25,38.5 81.25,27 82.75,27 82.75,38.5 83.25,38.5 83.25,27 84.75,27 84.75,38.5 85.25,38.5 85.25,26.5 74.75,26.5 74.75,38.5 75.25,38.5
Y1 on TOP (solid shape): 15.25,47 16.75,47 16.75,58.5 17.25,58.5 17.25,47 18.75,47 18.75,58.5 19.25,58.5 19.25,47 20.75,47 20.75,58.5 21.25,58.5 21.25,47 22.75,47 22.75,58.5 23.25,58.5 23.25,47 24.75,47 24.75,58.5 25.25,58.5 25.25,46.5 14.75,46.5 14.75,58.5 15.25,58.5
Y1 on TOP (solid shape): 15.25,7 16.75,7 16.75,18.5 17.25,18.5 17.25,7 18.75,7 18.75,18.5 19.25,18.5 19.25,7 20.75,7 20.75,18.5 21.25,18.5 21.25,7 22.75,7 22.75,18.5 23.25,18.5 23.25,7 24.75,7 24.75,18.5 25.25,18.5 25.25,6.5 14.75,6.5 14.75,18.5 15.25,18.5
Y1 on TOP (solid shape): 35.25,47 36.75,47 36.75,58.5 37.25,58.5 37.25,47 38.75,47 38.75,58.5 39.25,58.5 39.25,47 40.75,47 40.75,58.5 41.25,58.5 41.25,47 42.75,47 42.75,58.5 43.25,58.5 43.25,47 44.75,47 44.75,58.5 45.25,58.5 45.25,46.5 34.75,46.5 34.75,58.5 35.25,58.5
Y1 on TOP (solid shape): 35.25,7 36.75,7 36.75,18.5 37.25,18.5 37.25,7 38.75,7 38.75,18.5 39.25,18.5 39.25,7 40.75,7 40.75,18.5 41.25,18.5 41.25,7 42.75,7 42.75,18.5 43.25,18.5 43.25,7 44.75,7 44.75,18.5 45.25,18.5 45.25,6.5 34.75,6.5 34.75,18.5 35.25,18.5
Y1 on TOP (solid shape): 55.25,47 56.75,47 56.75,58.5 57.25,58.5 57.25,47 58.75,47 58.75,58.5 59.25,58.5 59.25,47 60.75,47 60.75,58.5 61.25,58.5 61.25,47 62.75,47 62.75,58.5 63.25,58.5 63.25,47 64.75,47 64.75,58.5 65.25,58.5 65.25,46.5 54.75,46.5 54.75,58.5 55.25,58.5
Y1 on TOP (solid shape): 55.25,7 56.75,7 56.75,18.5 57.25,18.5 57.25,7 58.75,7 58.75,18.5 59.25,18.5 59.25,7 60.75,7 60.75,18.5 61.25,18.5 61.25,7 62.75,7 62.75,18.5 63.25,18.5 63.25,7 64.75,7 64.75,18.5 65.25,18.5 65.25,6.5 54.75,6.5 54.75,18.5 55.25,18.5
Y1 on TOP (solid shape): 75.25,47 76.75,47 76.75,58.5 77.25,58.5 77.25,47 78.75,47 78.75,58.5 79.25,58.5 79.25,47 80.75,47 80.75,58.5 81.25,58.5 81.25,47 82.75,47 82.75,58.5 83.25,58.5 83.25,47 84.75,47 84.75,58.5 85.25,58.5 85.25,46.5 74.75,46.5 74.75,58.5 75.25,58.5
Y1 on TOP (solid shape): 75.25,7 76.75,7 76.75,18.5 77.25,18.5 77.25,7 78.75,7 78.75,18.5 79.25,18.5 79.25,7 80.75,7 80.75,18.5 81.25,18.5 81.25,7 82.75,7 82.75,18.5 83.25,18.5 83.25,7 84.75,7 84.75,18.5 85.25,18.5 85.25,6.5 74.75,6.5 74.75,18.5 75.25,18.5
